# Altium PCB PCB2-PICO-IMU_V2-FPCB.PcbDoc
Units mm, origin at the board's own origin, x right, y up, seen from the top; angles counter-clockwise.
Board outline 30.11 x 20.1 mm, 4 copper layers (Top Layer, Layer 1, Layer 2, Bottom Layer), stack 0.603 mm thick; 23 components, 16 nets, 120 pads, 33 vias.
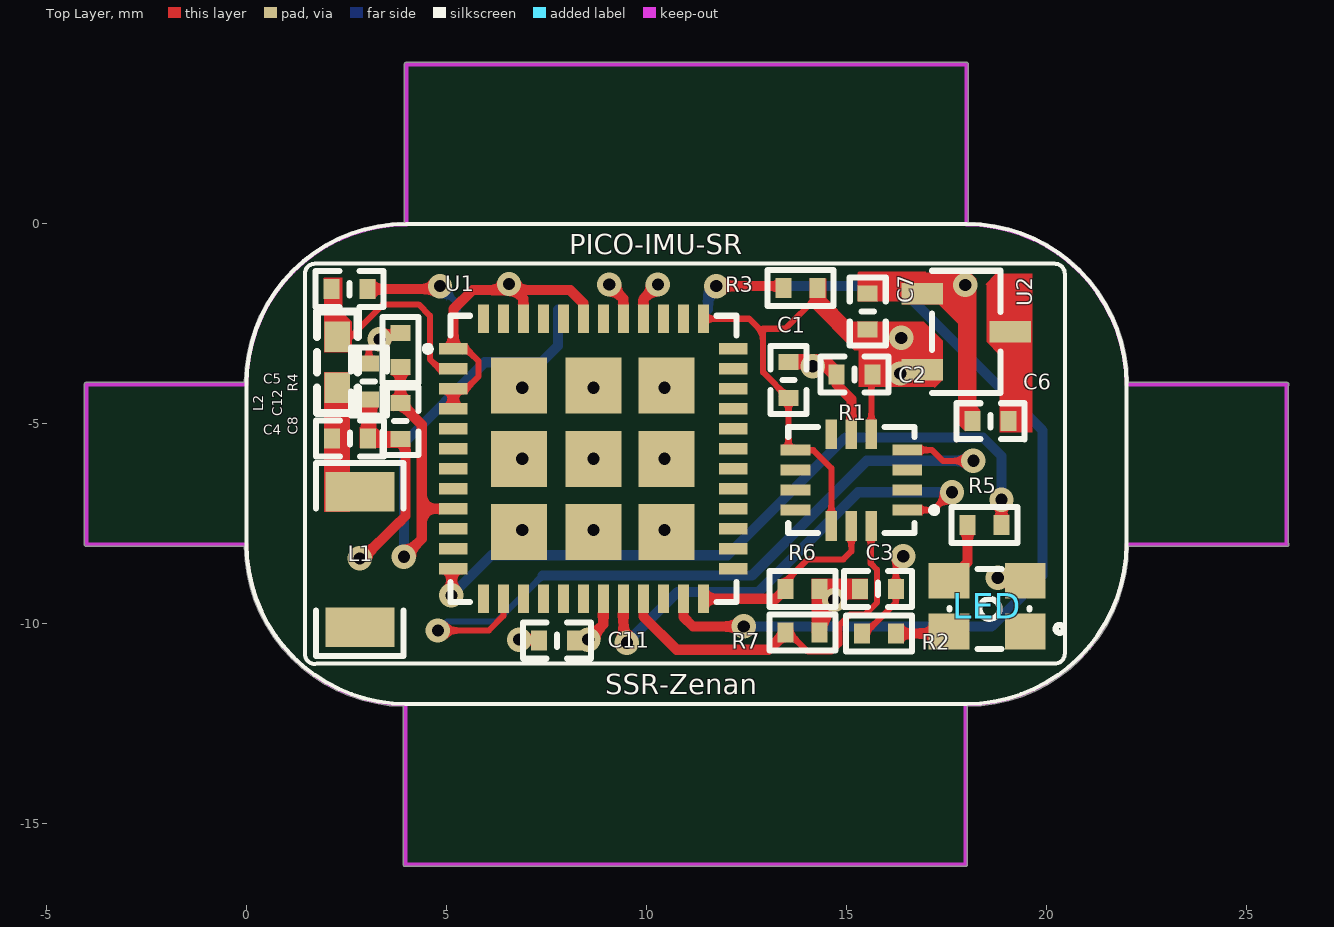
[diagram p0: Top Layer view]
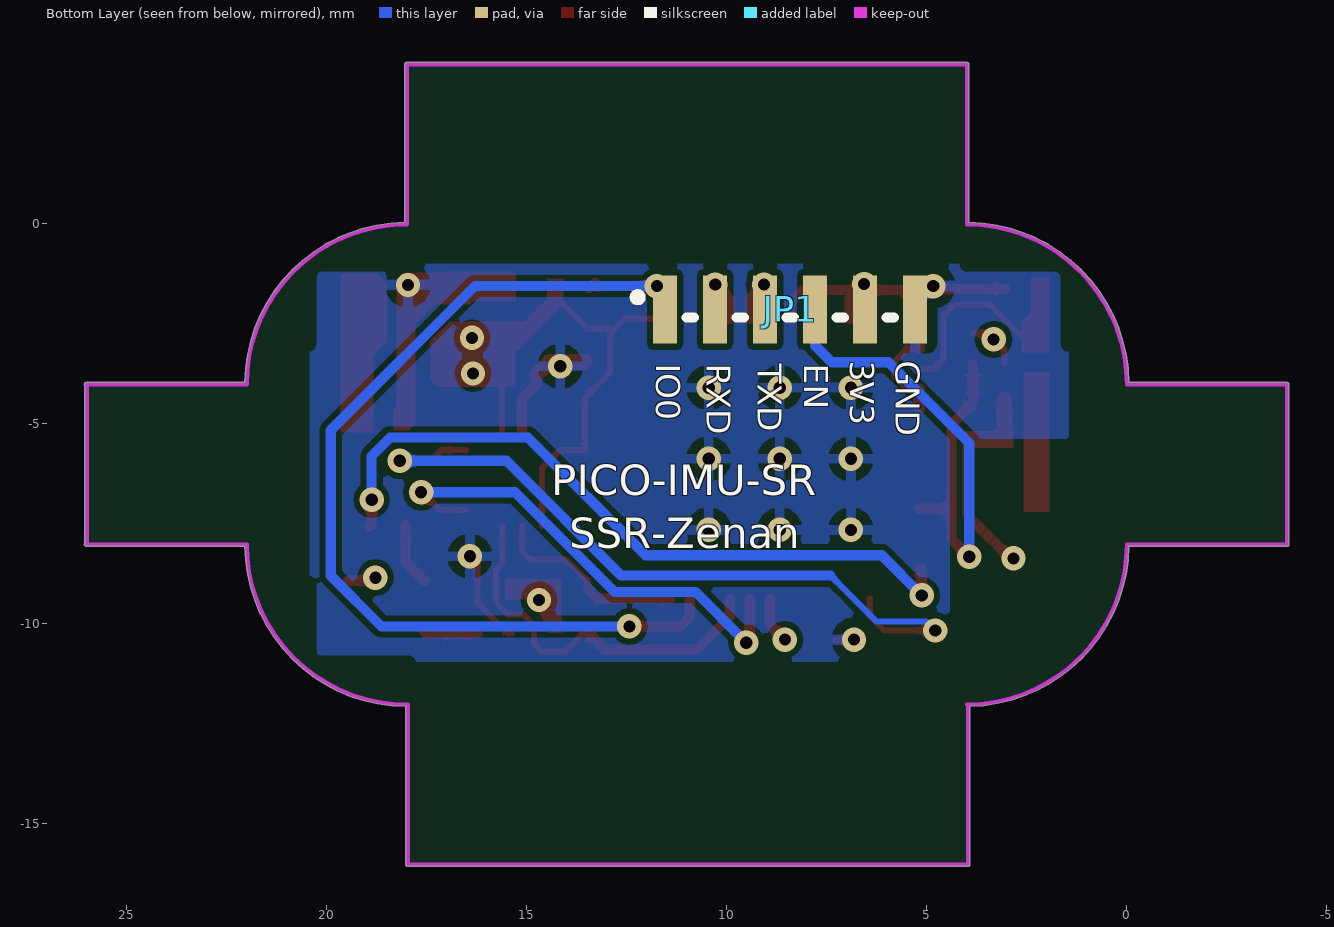
[diagram p1: Bottom Layer view, seen from below]
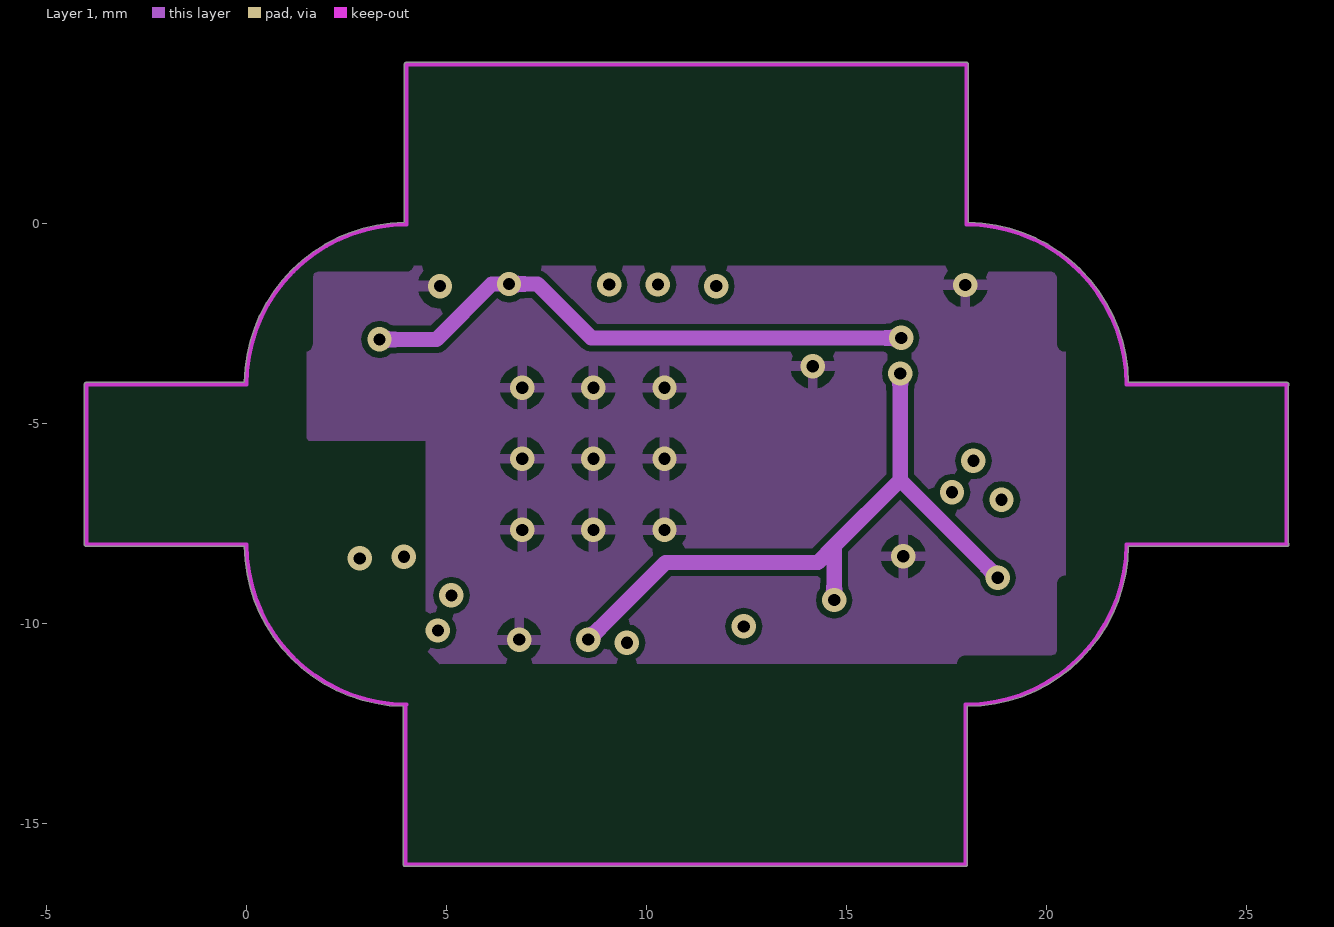
[diagram p2: Layer 1]
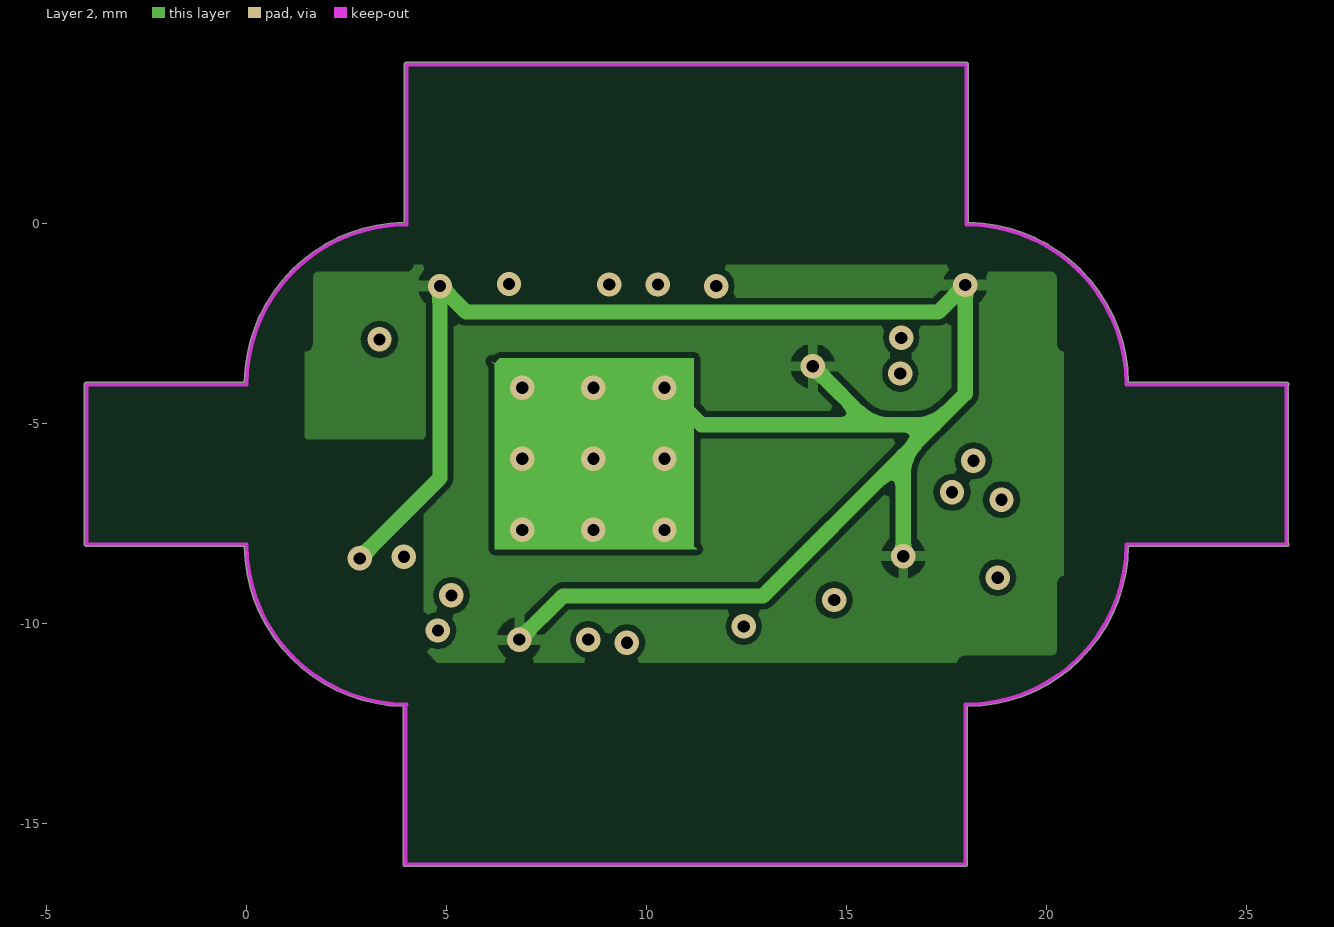
[diagram p3: Layer 2]
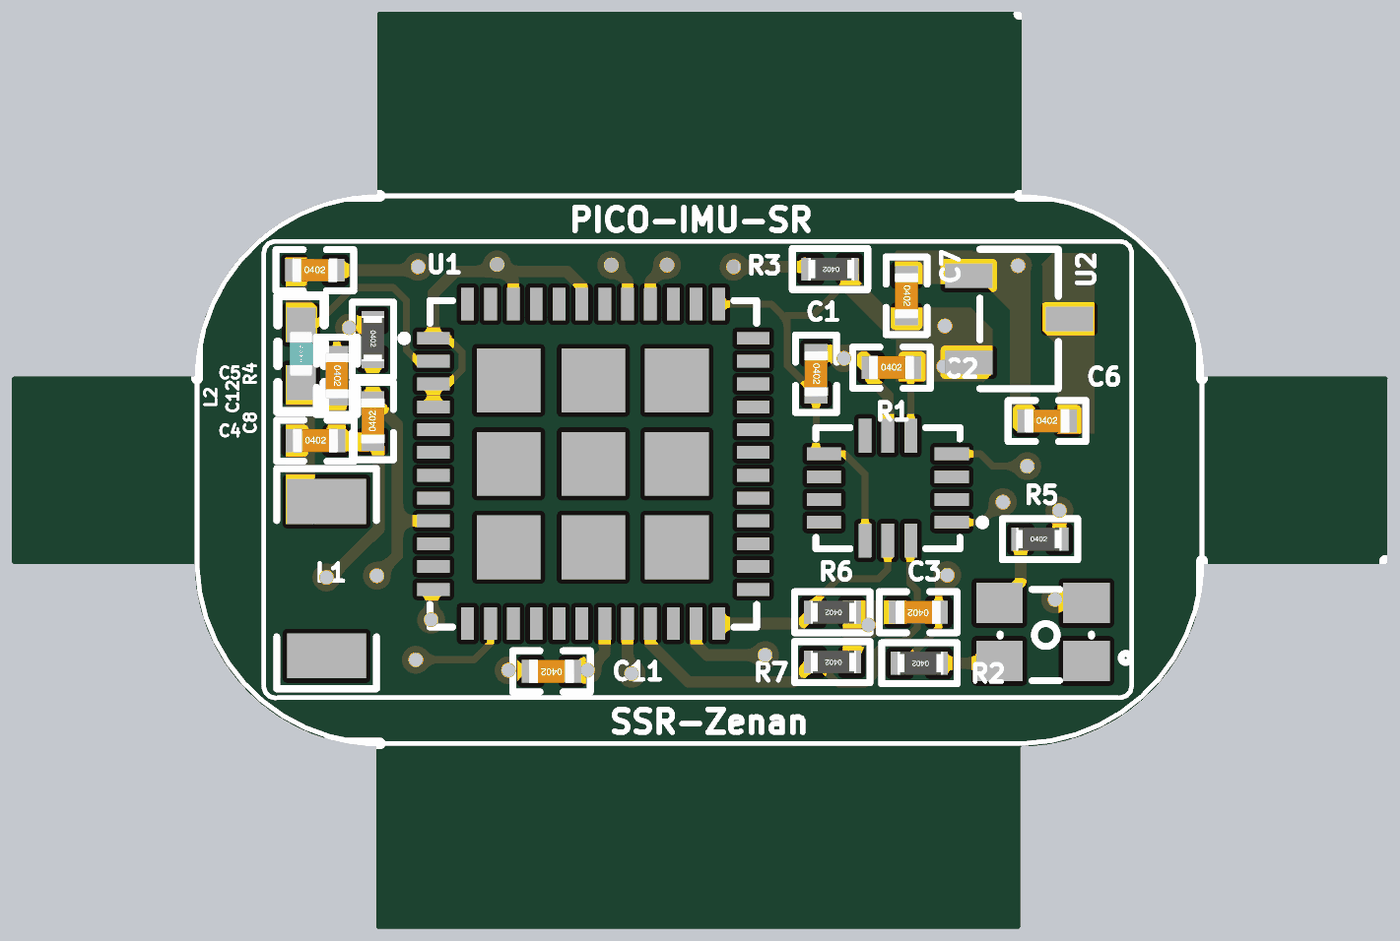
[diagram p4: 3D render of the assembled board from above, using the file's embedded part models]

## Layer stack, top to bottom
Top Solder: solder mask 0.0102, Solder Resist, Dk 3.5
Top Layer: signal copper 0.0356
Dielectric 2: prepreg 0.0711, PP-006, Dk 4.1
Layer 1: signal copper 0.035
Dielectric 1: dielectric 0.32, FR-4, Dk 4.8
Layer 2: signal copper 0.035
Dielectric 3: prepreg 0.0711, PP-006, Dk 4.1
Bottom Layer: signal copper 0.0356
Bottom Solder: solder mask 0.0102, Solder Resist, Dk 3.5

## Board outline
3.923,-16.013 3.923,-12.063 cw(c4,-8.013) -0.05,-8.064 -4,-8.064 cw(c-4,-8.013) -4.05,-8.013 -4.05,-4.013 cw(c-4,-4.013) -4,-3.963 -0.05,-3.963 cw(c4,-4.013) 3.95,0.037 3.95,3.987 cw(c4,3.987) 4,4.037 18,4.037 cw(c18,3.987) 18.05,3.987 18.05,0.037 cw(c18,-4.013) 22.05,-3.963 26.01,-3.963 cw(c26.01,-4.013) 26.06,-4.013 cw(c26.01,-4.013) 26.05,-4.043 26.05,-7.984 cw(c26.01,-8.013) 26.06,-8.013 cw(c26.01,-8.013) 26.01,-8.064 22.05,-8.064 cw(c18,-8.013) 18.024,-12.064 18.024,-16.013 cw(c17.973,-16.013) 17.973,-16.064 3.973,-16.064 cw(c3.973,-16.013)

## Design rules (kind name [scope] priority, off if disabled: settings)
Clearance [All] p1: gap=0.152 ignorepadtopadclearanceinfootprint=FALSE except(0: Arc-Hole Track-Hole SMDPad-Hole THPad-Hole Via-Hole Fill-Hole Poly-Hole Region-Hole Text-Hole)
HoleToHoleClearance [All] p1: gap=0.102 allowstackedmicrovias=TRUE
MinimumSolderMaskSliver [All] p1: minsoldermaskwidth=0.102
PolygonConnect [All] p1: connectstyle=Relief reliefconductorwidth=0.254 reliefentries=4 polygonreliefangle="90 Angle" airgapwidth=0.254
RoutingVias [All] p1: holewidth=0.305 width=0.61 viastyle="Through Hole" minholewidth=0.305 minwidth=0.61 maxholewidth=0.381 maxwidth=0.635
SilkToSilkClearance [All] p1: silktosilkclearance=0.025
SilkToSolderMaskClearance [IsPad] p1: minsilkscreentomaskgap=0 clearancetoexposedcopper=TRUE
SolderMaskExpansion [All] p1: expansion=0.102
Width [All] p1: maxlimit=1.27 minlimit=0.152 preferedwidth=0.152
26 further rules are at their usual default settings.

## Components (designator, comment, footprint, x,y, rotation, side; value= is the part's Value field where it differs from the comment)
C1 "Cap" "C 0402_L" 13.551,-3.899 r270 top value=10nF
C2 "Cap" "C 0402_L" 15.202,-3.765 r0 top value=2.2uF
C3 "Cap" "C 0402_L" 15.787,-9.124 r180 top value=0.1uF
C4 "Cap" "C 0402_L" 2.593,-5.365 r0 top value=2.7pF
C5 "Cap" "C 0402_L" 2.579,-1.631 r0 top value=4.7pF
C6 "Cap" "C 0402_L" 18.606,-4.933 r0 top value=10uF
C7 "Cap" "C 0402_L" 15.533,-2.19 r270 top value=10uF
C8 "Cap" "C 0402_L" 3.849,-4.933 r90 top value=0.1uF
C11 "Cap" "C 0402_L" 7.76,-10.42 r180 top value=100nF
C12 "Cap" "C 0402_L" 3.061,-3.943 r270 top value=100nF
JP1 "HDR-1X6" debug 11.541,-2.139 r180 bottom
L1 "陶瓷天线" Huaxin 2.756,-8.286 r0 top
L2 "1.6nH" "L 0402" 2.276,-3.46 r90 top
LED "RGB-3528" LED-RGB 19.47,-10.191 r0 top (schematic designator LED2)
R1 "ICM-42605/ QMI8658C" ICM-42605 15.075,-6.254 r180 top
R2 "10K" "R 0402_L" 15.837,-10.242 r180 top
R3 "10K" "R 0402_L" 13.882,-1.606 r180 top
R4 "10K" "R 0402_L" 3.849,-3.13 r270 top
R5 "600" "R 0402_L" 18.428,-7.524 r0 top
R6 "4.7K" "R 0402_L" 13.932,-9.124 r180 top
R7 "4.7K" "R 0402_L" 13.932,-10.216 r180 top
U1 "ESP32-PICO-D4" ESP32-PICO-D4 8.675,-5.873 r270 top
U2 "ME6210A33M3G" ME6210A33M3G 17.996,-2.698 r180 top

## Footprints (in the part's own frame and the unit in brackets; to place one, negate y for a bottom-side part, rotate by r counter-clockwise, add the part's x,y. Pads: shape width x height; smd on the part's side, far side on the other; paste and mask are expansions set on the pad)
"C 0402_L" [mm] "无极性贴片电容"
  rect 0.4x0.5 smd: 1(-0.45,0) 2(0.45,0)
  silkscreen extent -0.85,-0.45 0.85,0.45, body extent -0.5,-0.26 0.5,0.26, height 0.53
debug [mm]
  rect 0.6x1.7 smd: 1(0,0) 2(1.25,0) 3(2.5,0) 4(3.75,0) 5(5,0) 6(6.25,0)
  silkscreen extent -0.79,-0.2 5.72,0.4
ESP32-PICO-D4 [mm]
  rect 0.28x0.711 smd: 1(-2.75,-3.5) 2(-2.25,-3.5) 3(-1.75,-3.5) 4(-1.25,-3.5) 5(-0.75,-3.5) 6(-0.25,-3.5) 7(0.25,-3.5) 8(0.75,-3.5) 9(1.25,-3.5) 10(1.75,-3.5) 11(2.25,-3.5) 12(2.75,-3.5) 25(2.75,3.5) 26(2.25,3.5) 27(1.75,3.5) 28(1.25,3.5) 29(0.75,3.5) 30(0.25,3.5) 31(-0.25,3.5) 32(-0.75,3.5) 33(-1.25,3.5) 34(-1.75,3.5) 35(-2.25,3.5) 36(-2.75,3.5)
  rect 0.711x0.28 smd: 13(3.5,-2.75) 14(3.5,-2.25) 15(3.5,-1.75) 16(3.5,-1.25) 17(3.5,-0.75) 18(3.5,-0.25) 19(3.5,0.25) 20(3.5,0.75) 21(3.5,1.25) 22(3.5,1.75) 23(3.5,2.25) 24(3.5,2.75) 37(-3.5,2.75) 38(-3.5,2.25) 39(-3.5,1.75) 40(-3.5,1.25) 41(-3.5,0.75) 42(-3.5,0.25) 43(-3.5,-0.25) 44(-3.5,-0.75) 45(-3.5,-1.25) 46(-3.5,-1.75) 47(-3.5,-2.25) 48(-3.5,-2.75)
  rect 1.4x1.4 smd: 49(-1.829,1.829) 49(-1.829,0) 49(-1.829,-1.854) 49(0,1.829) 49(0,0) 49(0,-1.854) 49(1.829,1.829) 49(1.829,0) 49(1.829,-1.854)
  silkscreen extent -3.58,-4.21 3.58,3.58
Huaxin [mm] "陶瓷天线"
  rect 1.728x0.984 smd: 1(0.079,-1.795) 2(0.079,1.589)
  silkscreen extent -1.01,-2.52 1.17,2.31
ICM-42605 [mm]
  rect 0.745x0.28 smd: 1(-1.445,0.901) 2(-1.445,0.401) 3(-1.445,-0.099) 4(-1.445,-0.599) 8(1.35,-0.599) 9(1.35,-0.099) 10(1.35,0.401) 11(1.35,0.901)
  rect 0.28x0.745 smd: 5(-0.548,-0.997) 6(-0.048,-0.997) 7(0.452,-0.997) 12(0.452,1.298) 13(-0.048,1.298) 14(-0.548,1.298)
  silkscreen extent -2.19,-1.18 1.53,1.48
"L 0402" [mil] "小功率贴片电感"
  rect 30x25 smd: 1(-25,0) 2(25,0)
  silkscreen extent -50,-20 50,20, body extent -20,-10 20,10, height 20
LED-RGB [mil]
  rect 40x35 smd: 1(0,0) 2(-75,0) 3(-75,50) 4(0,50)
  silkscreen extent -74,-17 38,62
ME6210A33M3G [mm]
  rect 1.037x0.532 smd: 1(1.101,-0.95) 2(1.101,0.95) 3(-1.101,0)
  silkscreen extent -0.86,-1.53 0.86,1.53
"R 0402_L" [mm] "1/16W贴片电阻"
  rect 0.4x0.5 smd: 1(-0.4,0) 2(0.45,0)
  silkscreen extent -0.8,-0.45 0.85,0.45, body extent -0.5,-0.25 0.5,0.25, height 0.3

## Part data
C1 C2 C3 C4 C5 C6 C7 C8 C11 C12: "Capacitor", LatestRevisionDate=17-Jul-2002, LatestRevisionNote="Re-released for DXP Platform.", PackageDescription="Radial Cap, Thru-Hole; 2 Leads; 0.3 in Pin Spacing", PackageReference=RAD-0.3, Published=8-Jun-2000, Publisher="Altium Limited"
JP1: library part "Header 6", "6P接插件", BOM名称=6P接插件, 学习资源=www.ooocke.com, 版权归属=源创客
L1: library part Huaxin, BOM_JLCPCB Part Class="Extended Part", BOM_Manufacturer="Huaxin S&T", BOM_Manufacturer Part=RFECA3216060A1T, BOM_Supplier=LCSC, BOM_Supplier Part=C127620, Contributor=LCSC, nameAlias=Value, spicePre=L, spiceSymbolName=RFECA3216060A1T
L2: library part L, "小功率贴片电感", BOM名称=小功率贴片电感, 学习资源=www.ooocke.com, 版权归属=源创客
LED: library part LED-RGB-3528, "三基色LED", BOM名称=三基色LED, 学习资源=www.ooocke.com, 版权归属=源创客
R1: library part ICM-42605, BOM_JLCPCB Part Class="Extended Part", BOM_Manufacturer=InvenSense, BOM_Manufacturer Part=ICM-42605, BOM_Supplier=LCSC, BOM_Supplier Part=C2655099, Contributor=LCSC, spicePre=R, spiceSymbolName=ICM-42605
R2 R3 R4 R5 R6 R7: library part R, "贴片电阻", BOM名称=贴片电阻, 学习资源=www.ooocke.com, 版权归属=源创客
U1: BOM_JLCPCB Part Class="Extended Part", BOM_Manufacturer="Espressif Systems", Frequency=-, BOM_Manufacturer Part=ESP32-PICO-D4, BOM_Supplier=LCSC, BOM_Supplier Part=C193707, Contributor=LCSC, spicePre=U, spiceSymbolName=ESP32-PICO-D4
U2: BOM_JLCPCB Part Class="Extended Part", BOM_Manufacturer="Nanjing Micro One Elec", BOM_Manufacturer Part=ME6210A33M3G, BOM_Supplier=LCSC, BOM_Supplier Part=C236680, Contributor=LCSC, spicePre=U, spiceSymbolName=ME6210A33M3G

## Via types
v1: diameter 0.61, hole 0.305, Top Layer to Bottom Layer, tented both sides, 33 vias

## Nets (pads, with @x,y where several pads share a name; then routed paths per layer and width w, separated by ;. In a path a pad name is that pad's centre, name@x,y a point inside that pad or via, vN(x,y) a via of type N, cw(c..) or ccw(c..) an arc to the next point about the centre after c; other vN are vias at no path point)
3V3: C1.2 C2.2 C3.2 C7.2 C11.1 C12.1 JP1.5 LED.4 R1.5 R1.8 R1.12 R3.1 R4.1 R6.1 R7.1 U1.1 U1.3 U1.4 U1.19 U1.37 U1.43 U1.46 U2.2 | length 53.6
  Top Layer w0.152: C12.1 3.061,-3.155 v1(3.329,-2.888) 3.487,-2.73 R4.1 ; U1.3 5.493,-4.123 5.804,-3.812 5.804,-3.434 5.493,-3.123 U1.1 ; U1.37 12.566,-2.373 12.916,-2.723 ; R3.1 14.282,-1.815 13.475,-2.622 12.916,-2.622 12.916,-2.723 ; R1.12 14.623,-6.107 14.171,-5.655 R1.8 13.551,-5.655 C1.2 12.916,-3.714 12.916,-2.723 ; R1.5 15.623,-3.794 C2.2
  Top Layer w0.254: U1.4 U1.3 ; U1.1 5.174,-2.134 5.652,-1.657 6.414,-1.657 v1(6.566,-1.504) v1@6.719,-1.657 ; U1.46 6.925,-1.862 v1@6.719,-1.657 ; U1.43 8.425,-1.982 8.099,-1.657 v1@6.719,-1.657 ; v1(8.548,-10.394) 8.925,-10.017 U1.19 ; v1(18.784,-8.845) 18.86,-8.921 LED.4
  Layer 1 w0.381: v1(3.329,-2.888) 4.751,-2.888 6.135,-1.504 v1(6.566,-1.504) 7.278,-1.504 8.624,-2.85 v1(16.371,-2.85) ; v1(8.548,-10.394) 10.478,-8.464 14.288,-8.464 14.694,-8.057 ; v1(14.694,-9.404) 14.694,-8.057 ; v1(16.345,-3.739) 16.345,-6.406 ; v1(18.784,-8.845) 16.345,-6.406 ; 14.694,-8.057 16.345,-6.406
AD0: R1.1 U1.20 | length 12.3
  Top Layer w0.152: R1.1 17.172,-7.155 17.641,-6.686 v1@17.844,-6.686
  Top Layer w0.254: U1.20 9.425,-10.382 v1(9.513,-10.47)
  Bottom Layer w0.254: v1(9.513,-10.47) 10.783,-9.2 12.805,-9.2 15.295,-6.711 v1(17.641,-6.711)
EN: C8.2 JP1.4 R4.2 U1.9 | length 14.6
  Top Layer w0.254: R4.2@3.849,-3.504 C8.2 4.385,-5.02 4.385,-7.123 ; v1@3.95,-8.311 4.385,-7.876 4.385,-7.123 ; U1.9 4.385,-7.123
  Bottom Layer w0.254: v1(3.938,-8.323) 3.938,-5.479 5.957,-3.46 7.379,-3.46 7.791,-3.048 JP1.4
GND: C1.1 C2.1 C3.1 C4.2 C5.2 C6.1 C7.1 C8.1 C11.2 C12.2 JP1.6 R1.6 R2.2 U1.49 U2.1 | length 63.1
  Top Layer w0.152: C4.2 C4.2@3.061,-5.347 ; v1(6.82,-10.394) 7.285,-10.394 C11.2 ; R2.2 15.464,-10.242 16.237,-9.469 C3.1 v1@16.237,-8.369
  Top Layer w0.254: v1@2.871,-8.4 3.802,-7.469 3.815,-7.469 3.979,-7.305 3.979,-5.513 C8.1 3.061,-5.383 C4.2 ; C5.2 4.763,-1.631 v1(4.839,-1.555) ; C2.1 14.752,-4.012 15.123,-4.383 R1.6
  Top Layer w0.381: C4.2@3.061,-5.347 C12.2 ; C1.1 14.437,-3.449 C2.1
  Layer 2 w0.381: v1(2.833,-8.362) 4.839,-6.356 v1(4.839,-1.555) 5.487,-2.203 17.298,-2.203 v1(17.971,-1.53) 17.971,-4.247 17.196,-5.022 ; v1(6.82,-10.394) 7.913,-9.302 12.916,-9.302 16.422,-5.797 ; v1(10.453,-4.095) 11.38,-5.022 15.622,-5.022 ; v1(14.161,-3.562) 15.622,-5.022 ; v1(16.422,-8.311) 16.422,-5.797 ; 15.622,-5.022 17.196,-5.022 ; 16.422,-5.797 17.196,-5.022
  Bottom Layer w0.152: v1(4.839,-1.555) 5.291,-2.007 JP1.6
  other v1: 6.897,-7.651 8.675,-7.651 10.453,-7.651 6.897,-5.873 8.675,-5.873 10.453,-5.873 6.897,-4.095 8.675,-4.095
INT0: R1.4 U1.14 | length 19.1
  Top Layer w0.152: v1(4.788,-10.166) 6.058,-10.166 6.425,-9.799 U1.14 ; R1.4 17.143,-5.655 17.412,-5.924 v1(18.174,-5.924)
  Bottom Layer w0.152: v1(4.788,-10.166) 5.017,-9.937 6.262,-9.937 7.405,-8.794
  Bottom Layer w0.254: 7.405,-8.794 12.637,-8.794 15.507,-5.924 v1(18.174,-5.924)
IO0: JP1.1 R3.2 U1.23 | length 25.9
  Top Layer w0.254: U1.23 10.925,-9.825 11.164,-10.064 v1(12.434,-10.064) ; v1(11.748,-1.555) 13.195,-1.555 13.212,-1.572 13.305,-1.479 R3.2
  Bottom Layer w0.254: JP1.1 11.541,-1.779 JP1.1@11.765,-1.555 ; v1(11.748,-1.555) JP1.1@11.765,-1.555 ; JP1.1@11.841,-1.479 JP1.1@11.765,-1.555 ; v1(12.434,-10.064) 18.631,-10.064 19.901,-8.794 19.901,-5.162 16.295,-1.555 JP1.1@11.765,-1.555
LED0: R5.2 U1.12 | length 18.1
  Top Layer w0.254: v1@5.137,-9.277 5.137,-8.623 U1.12 ; v1(18.878,-6.896) R5.2 R5.2@18.929,-7.575
  Bottom Layer w0.254: v1(5.125,-9.289) 6.128,-8.286 12.027,-8.286 14.974,-5.34 18.416,-5.34 18.878,-5.802 v1(18.878,-6.896)
NetC4_1: C4.1 L1.2 L2.1
NetC5_1: C5.1 L2.2 U1.2 | length 4.5
  Top Layer w0.152: L2.2 2.608,-2.825 3.421,-2.012 4.306,-2.012 4.585,-2.292 4.585,-3.384 4.825,-3.623 U1.2
NetLED1_2: LED.2 R2.1 | length 1.3
  Top Layer w0.254: R2.1 17.514,-10.242 LED.2
NetLED2_2: LED.3 R5.1 | length 1.6
  Top Layer w0.254: LED.3 18.028,-8.457 R5.1
RXD0: JP1.2 U1.40 | length 1
  Top Layer w0.254: U1.40 9.925,-1.88 v1(10.288,-1.516)
SCL0: R1.13 R6.2 U1.24 | length 4.9
  Top Layer w0.152: R6.2 13.482,-8.939 14.034,-8.388 14.923,-8.388 15.123,-8.187 R1.13
  Top Layer w0.254: U1.24 13.234,-9.373 R6.2
SDA0: R1.14 R7.2 U1.21 | length 9.9
  Top Layer w0.152: R7.2 13.482,-10.14 14.038,-10.695 14.627,-10.695 14.821,-10.501 14.821,-10.035 15.093,-9.763 15.471,-9.763 15.765,-9.469 15.765,-8.646 15.609,-8.489 15.609,-7.567 R1.14
  Top Layer w0.254: U1.21 9.925,-9.815 10.757,-10.648 13.051,-10.648 R7.2
TXD0: JP1.3 U1.41 | length 1
  Top Layer w0.254: v1(9.069,-1.516) 9.425,-1.872 U1.41
VBAT: C6.2 U2.3
pads on no net: L1.1 LED.1 R1.2 R1.3 R1.7 R1.9 R1.10 R1.11 U1.5 U1.6 U1.7 U1.8 U1.10 U1.11 U1.13 U1.15 U1.16 U1.17 U1.18 U1.22 U1.25 U1.26 U1.27 U1.28 U1.29 U1.30 U1.31 U1.32 U1.33 U1.34 U1.35 U1.36 U1.38 U1.39 U1.42 U1.44 U1.45 U1.47 U1.48

## Polygon pours and split planes (outlines as drawn)
GND on Layer 2 "GND_L03_P008" (solid, pour order 8): 1.461,-0.971 1.461,-5.34 1.512,-5.39 4.433,-5.39 4.433,-10.623 4.788,-10.978 4.796,-10.971 20.112,-10.971 20.435,-10.648 20.435,-1.174 20.333,-1.174 20.181,-1.022 1.512,-1.022
GND on Layer 1 "GND_L02_P006" (solid, pour order 6): 1.512,-0.996 1.512,-5.365 1.563,-5.416 4.484,-5.416 4.484,-10.648 4.839,-11.004 4.847,-10.996 20.163,-10.996 20.486,-10.674 20.486,-1.199 20.384,-1.199 20.232,-1.047 1.563,-1.047
GND on Bottom Layer "GND_L04_P010" (solid, pour order 10): 1.448,-0.952 1.448,-5.321 1.499,-5.372 4.42,-5.372 4.42,-10.604 4.776,-10.96 4.783,-10.952 20.099,-10.952 20.422,-10.63 20.422,-1.155 20.32,-1.155 20.168,-1.003 1.499,-1.003

## Keep-outs
Keep-Out Layer:
  lines w0.1: 3.973,-12.013 3.973,-16.013 17.973,-16.013 17.973,-12.013 ; 4,-12.013 cw(c4,-8.013) 0,-8.013 -4,-8.013 -4,-4.013 0,-4.013 cw(c4,-4.013) 4,-0.013 4,3.987 18,3.987 18,-0.013 cw(c18,-4.013) 22,-4.013 26.01,-4.013 ; 18,-12.013 ccw(c18,-8.013) 22,-8.013 26.01,-8.013 ; 26,-8.013 26,-4.013

## Other copper
Top Layer:
  region net 3V3: 14.136,-8.87 14.136,-10.216 14.212,-10.216 14.457,-10.216 14.654,-9.774 15.05,-9.378 15.533,-9.378 15.533,-8.87
  region net 3V3: 14.085,-1.377 14.085,-2.038 15.202,-3.155 15.456,-3.155 16.168,-2.444 15.075,-2.444 14.491,-1.86 14.491,-1.377
  region net GND: 15.279,-1.225 15.279,-1.936 16.707,-1.936 16.98,-1.663 16.98,-1.199 15.304,-1.199
  region net 3V3: 15.304,-2.469 15.329,-2.444 16.93,-2.444 17.412,-2.927 17.412,-3.892 17.209,-4.095 17.184,-4.07 15.304,-4.07
  region net GND: 17.793,-5.009 17.793,-2.495 17.311,-2.012 16.396,-2.012 16.396,-1.479 16.371,-1.453 16.599,-1.225 18.098,-1.225 18.25,-1.377 18.25,-4.552 18.352,-4.654 18.327,-4.679 18.327,-5.162 17.996,-5.162 17.971,-5.187
  region net VBAT: 18.479,-1.504 18.504,-1.53 18.504,-2.952 18.835,-3.282 18.835,-5.213 19.647,-5.213 19.647,-1.25 18.733,-1.25
  region net GND: 2.833,-5.594 4.052,-5.594 4.077,-5.568 4.077,-5.187 3.341,-5.187 3.239,-5.086 2.833,-5.086
  region net NetC5_1: 1.944,-1.377 1.944,-3.206 2.629,-3.206 2.629,-2.444 2.401,-2.215 2.401,-1.352 1.944,-1.352 1.918,-1.377
  region net NetC4_1: 1.944,-3.714 1.944,-7.194 2.579,-7.194 2.579,-3.714
Layer 2:
  region net GND: 6.135,-3.435 6.211,-3.511 6.211,-8.134 11.265,-8.134 11.189,-8.057 11.189,-3.358 6.338,-3.358 6.185,-3.511

## Silkscreen, mask and mechanical layers (free items; w line width, h text height)
Top Overlay:
  lines w0.1: 1.715,-11.004 cw(c1.715,-10.75) 1.461,-10.75 1.461,-1.25 cw(c1.715,-1.25) 1.715,-0.996 20.181,-0.996 ; 1.766,-10.996 20.155,-10.996 ; 3.973,-12 18,-12 ccw(c18,-8) 22,-8 22,-4 ccw(c18,-4) 18,0 4,0 ccw(c4,-4) 0,-4 0,-8 ccw(c4,-8) 4,-12 ; 20.206,-10.996 ccw(c20.206,-10.742) 20.46,-10.742 ; 20.206,-0.996 cw(c20.206,-1.25) 20.46,-1.25 20.461,-1.251 20.461,-10.741
  text "PICO-IMU-SR" at 8.077,-0.762 h0.5
  text "SSR-Zenan" at 8.966,-11.76 h0.5
Bottom Overlay:
  text "GND" at 5.772,-3.42 h0.6 r90
  text "3V3" at 6.915,-3.42 h0.6 r90
  text "EN" at 8.058,-3.496 h0.6 r90
  text "TXD" at 9.226,-3.496 h0.6 r90
  text "RXD" at 10.496,-3.496 h0.6 r90
  text "IO0" at 11.766,-3.496 h0.6 r90
  text "PICO-IMU-SR" at 14.39,-6.787 h0.76
  text "SSR-Zenan" at 13.932,-8.108 h0.76

## Dimensions
22,-8 to 26.01,-8.013 on Top Overlay
18,3.987 to 18,0 on Top Overlay
4,0 to 3.973,-12 on Top Overlay
0,-4 to 22,-4 on Top Overlay